# Altium PCB 数粒机接收板12通道.PcbDoc (part 2 of 5)
Units mm, origin at the board's own origin, x right, y up, seen from the top; angles counter-clockwise.
Board outline 316 x 52 mm, 2 copper layers (Top Layer, Bottom Layer); 209 components, 115 nets, 614 pads, 284 vias.
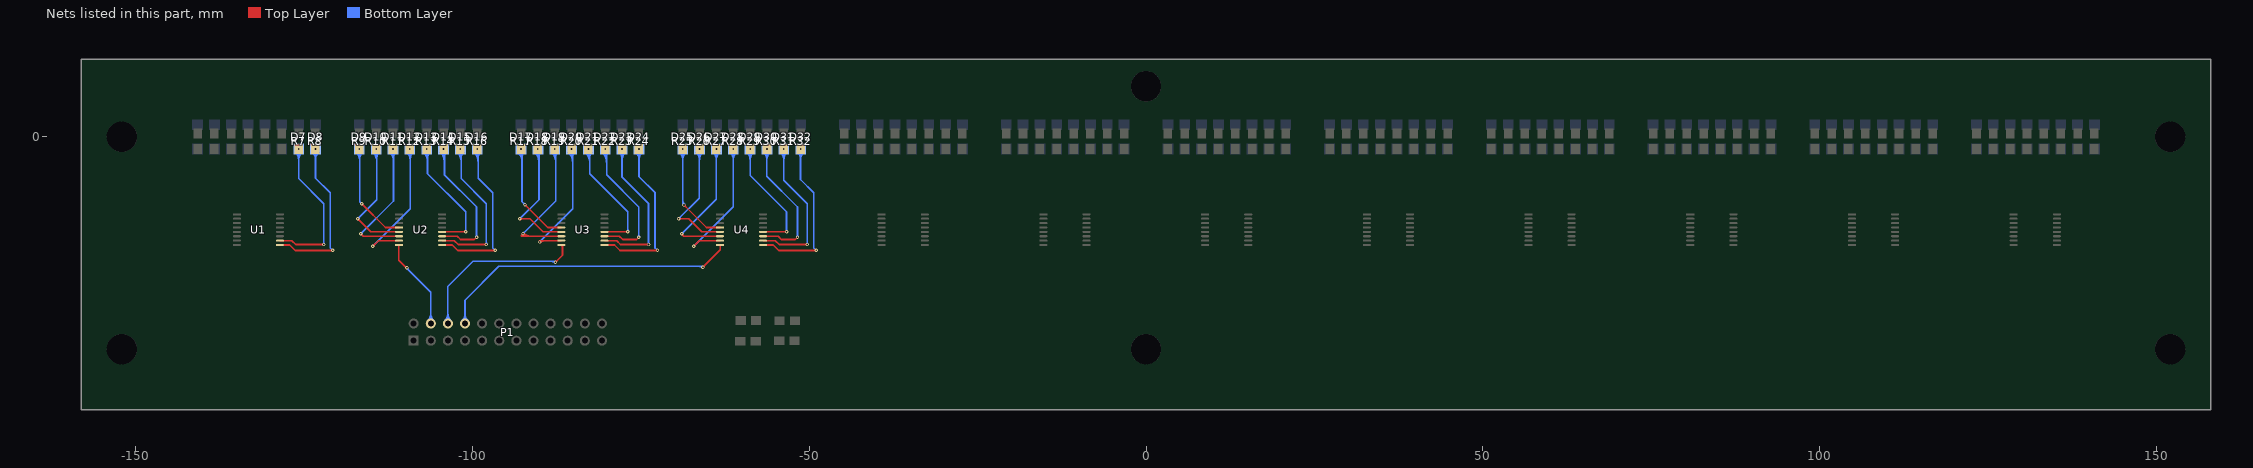
[diagram p2: the nets of this part, all layers, seen from the top]

## Via types
v1: diameter 0.508, hole 0.254, Top Layer to Bottom Layer, 284 vias

## Nets (pads, with @x,y where several pads share a name; then routed paths per layer and width w, separated by ;. In a path a pad name is that pad's centre, name@x,y a point inside that pad or via, vN(x,y) a via of type N, cw(c..) or ccw(c..) an arc to the next point about the centre after c; other vN are vias at no path point) (continued)
CH1-7: D7.1 R7.2 U1.10 | length 39.2
  Top Layer w0.254: U1.10@-128.531,-15.4 -126.774,-15.4 -126.194,-15.981 v1(-122.028,-15.981) ; -122.335,-15.981 cw(c-122.335,-16.287) v1@-122.118,-16.07 ; -122.335,-15.981 ccw(c-122.335,-15.674) v1@-122.118,-15.891 ; -122.335,-15.981 cw(c-122.335,-16.287) v1@-122.118,-16.07 ; -122.335,-15.981 ccw(c-122.335,-15.674) v1@-122.118,-15.891 ; -122.335,-15.981 ccw(c-122.335,-15.674) v1@-122.118,-15.891 ; -122.335,-15.981 cw(c-122.335,-16.287) v1@-122.118,-16.07
  Bottom Layer w0.254: v1(-125.75,-1.8) -125.75,-6.188 -122.028,-9.91 v1(-122.028,-15.981) ; D7.1@-126.226,-2.276 cw(c-127.375,-3.425) -125.75,-3.425 ; D7.1@-126.226,-2.276 cw(c-127.375,-3.425) -125.75,-3.425 ; D7.1@-126.226,-2.276 cw(c-127.375,-3.425) -125.75,-3.425 ; D7.1@-126.046,-2.096 cw(c-126.762,-2.812) -125.75,-2.812 ; D7.1@-126.046,-2.096 cw(c-126.762,-2.812) -125.75,-2.812 ; D7.1@-126.046,-2.096 cw(c-126.762,-2.812) -125.75,-2.812 ; D7.1@-125.84,-1.89 cw(c-126.057,-2.107) D7.1@-125.75,-2.107 ; D7.1@-125.84,-1.89 cw(c-126.057,-2.107) D7.1@-125.75,-2.107 ; D7.1@-125.84,-1.89 cw(c-126.057,-2.107) D7.1@-125.75,-2.107 ; -125.75,-3.425 cw(c-124.125,-3.425) D7.1@-125.274,-2.276 ; -125.75,-3.425 cw(c-124.125,-3.425) D7.1@-125.274,-2.276 ; -125.75,-3.425 cw(c-124.125,-3.425) D7.1@-125.274,-2.276 ; -125.75,-2.812 cw(c-124.738,-2.812) D7.1@-125.454,-2.096 ; -125.75,-2.812 cw(c-124.738,-2.812) D7.1@-125.454,-2.096 ; -125.75,-2.812 cw(c-124.738,-2.812) D7.1@-125.454,-2.096 ; D7.1@-125.75,-2.107 cw(c-125.443,-2.107) D7.1@-125.66,-1.89 ; D7.1@-125.75,-2.107 cw(c-125.443,-2.107) D7.1@-125.66,-1.89 ; D7.1@-125.75,-2.107 cw(c-125.443,-2.107) D7.1@-125.66,-1.89 ; v1@-122.118,-15.891 ccw(c-122.335,-15.674) -122.028,-15.674 ; v1@-122.118,-15.891 ccw(c-122.335,-15.674) -122.028,-15.674 ; v1@-122.118,-15.891 ccw(c-122.335,-15.674) -122.028,-15.674 ; -122.028,-15.674 ccw(c-121.721,-15.674) v1@-121.938,-15.891 ; -122.028,-15.674 ccw(c-121.721,-15.674) v1@-121.938,-15.891 ; -122.028,-15.674 ccw(c-121.721,-15.674) v1@-121.938,-15.891
CH1-8: D8.1 R8.2 U1.9 | length 39.1
  Top Layer w0.254: U1.9@-128.531,-16.05 -127.089,-16.05 -126.27,-16.87 -120.733,-16.87 v1(-120.707,-16.844) ; -121.075,-16.87 ccw(c-121.075,-16.476) v1@-120.797,-16.754 ; -121.075,-16.87 ccw(c-121.075,-16.476) v1@-120.797,-16.754 ; -121.075,-16.87 ccw(c-121.075,-16.476) v1@-120.797,-16.754
  Bottom Layer w0.254: v1(-123.25,-1.8) -123.25,-6.123 -121.063,-8.31 -121.063,-16.489 v1(-120.707,-16.844) ; D8.1@-123.726,-2.276 cw(c-124.875,-3.425) -123.25,-3.425 ; D8.1@-123.726,-2.276 cw(c-124.875,-3.425) -123.25,-3.425 ; D8.1@-123.726,-2.276 cw(c-124.875,-3.425) -123.25,-3.425 ; D8.1@-123.546,-2.096 cw(c-124.262,-2.812) -123.25,-2.812 ; D8.1@-123.546,-2.096 cw(c-124.262,-2.812) -123.25,-2.812 ; D8.1@-123.546,-2.096 cw(c-124.262,-2.812) -123.25,-2.812 ; D8.1@-123.34,-1.89 cw(c-123.557,-2.107) D8.1@-123.25,-2.107 ; D8.1@-123.34,-1.89 cw(c-123.557,-2.107) D8.1@-123.25,-2.107 ; D8.1@-123.34,-1.89 cw(c-123.557,-2.107) D8.1@-123.25,-2.107 ; -123.25,-3.425 cw(c-121.625,-3.425) D8.1@-122.774,-2.276 ; -123.25,-3.425 cw(c-121.625,-3.425) D8.1@-122.774,-2.276 ; -123.25,-3.425 cw(c-121.625,-3.425) D8.1@-122.774,-2.276 ; -123.25,-2.812 cw(c-122.238,-2.812) D8.1@-122.954,-2.096 ; -123.25,-2.812 cw(c-122.238,-2.812) D8.1@-122.954,-2.096 ; -123.25,-2.812 cw(c-122.238,-2.812) D8.1@-122.954,-2.096 ; D8.1@-123.25,-2.107 cw(c-122.943,-2.107) D8.1@-123.16,-1.89 ; D8.1@-123.25,-2.107 cw(c-122.943,-2.107) D8.1@-123.16,-1.89 ; D8.1@-123.25,-2.107 cw(c-122.943,-2.107) D8.1@-123.16,-1.89
CH2: P1.4 U2.8 | length 27.8
  Top Layer w0.254: U2.8@-110.852,-16.05 -110.903,-16.101 -110.903,-18.317 -109.785,-19.435 v1(-109.684,-19.435) ; -110.074,-19.146 ccw(c-109.684,-18.756) v1@-109.684,-19.308 ; -110.074,-19.146 ccw(c-109.684,-18.756) v1@-109.684,-19.308 ; -110.074,-19.146 ccw(c-109.684,-18.756) v1@-109.684,-19.308 ; -110.903,-16.228 cw(c-110.674,-16.228) -110.836,-16.066 ccw(c-110.674,-16.228) -110.903,-16.228
  Bottom Layer w0.254: v1(-109.684,-19.435) -109.709,-19.46 -109.709,-19.486 -106.153,-23.042 -106.153,-24.236 -106.142,-24.247 P1.4@-106.142,-27.708 ; v1@-109.557,-19.435 ccw(c-109.066,-19.435) -109.413,-19.782 ; v1@-109.557,-19.435 ccw(c-109.066,-19.435) -109.413,-19.782 ; v1@-109.557,-19.435 ccw(c-109.066,-19.435) -109.413,-19.782 ; P1.4@-106.582,-27.267 ccw(c-107.646,-26.204) -106.142,-26.204 ; P1.4@-106.582,-27.267 ccw(c-107.646,-26.204) -106.142,-26.204 ; P1.4@-106.582,-27.267 ccw(c-107.646,-26.204) -106.142,-26.204 ; P1.4@-106.403,-27.447 ccw(c-107.033,-26.817) -106.142,-26.817 ; P1.4@-106.403,-27.447 ccw(c-107.033,-26.817) -106.142,-26.817 ; P1.4@-106.403,-27.447 ccw(c-107.033,-26.817) -106.142,-26.817 ; -106.142,-26.817 ccw(c-105.251,-26.817) P1.4@-105.881,-27.447 ; -106.142,-26.817 ccw(c-105.251,-26.817) P1.4@-105.881,-27.447 ; -106.142,-26.817 ccw(c-105.251,-26.817) P1.4@-105.881,-27.447 ; -106.142,-26.204 ccw(c-104.638,-26.204) P1.4@-105.701,-27.267 ; -106.142,-26.204 ccw(c-104.638,-26.204) P1.4@-105.701,-27.267 ; -106.142,-26.204 ccw(c-104.638,-26.204) P1.4@-105.701,-27.267
CH2-1: D9.1 R9.2 U2.4 | length 30.4
  Top Layer w0.254: v1(-116.371,-9.935) -112.856,-13.45 U2.4@-110.852,-13.45 ; v1@-116.371,-10.062 cw(c-116.371,-10.369) -116.154,-10.152 ; v1@-116.371,-10.062 cw(c-116.371,-10.369) -116.154,-10.152 ; v1@-116.371,-10.062 cw(c-116.371,-10.369) -116.154,-10.152 ; v1@-116.244,-9.935 ccw(c-115.937,-9.935) -116.154,-10.152 ; v1@-116.244,-9.935 ccw(c-115.937,-9.935) -116.154,-10.152 ; v1@-116.244,-9.935 ccw(c-115.937,-9.935) -116.154,-10.152
  Bottom Layer w0.254: v1(-116.75,-1.8) -116.679,-1.871 -116.679,-9.628 v1(-116.371,-9.935) ; D9.1@-117.226,-2.276 cw(c-118.547,-3.597) -116.679,-3.597 ; D9.1@-117.226,-2.276 cw(c-118.547,-3.597) -116.679,-3.597 ; D9.1@-117.226,-2.276 cw(c-118.547,-3.597) -116.679,-3.597 ; D9.1@-117.046,-2.096 cw(c-117.934,-2.984) -116.679,-2.984 ; D9.1@-117.046,-2.096 cw(c-117.934,-2.984) -116.679,-2.984 ; D9.1@-117.046,-2.096 cw(c-117.934,-2.984) -116.679,-2.984 ; D9.1@-116.84,-1.89 cw(c-117.229,-2.279) D9.1@-116.679,-2.279 ; D9.1@-116.84,-1.89 cw(c-117.229,-2.279) D9.1@-116.679,-2.279 ; D9.1@-116.84,-1.89 cw(c-117.229,-2.279) D9.1@-116.679,-2.279 ; -116.679,-3.253 cw(c-115.297,-3.253) D9.1@-116.274,-2.276 ; -116.679,-3.253 cw(c-115.297,-3.253) D9.1@-116.274,-2.276 ; -116.679,-3.253 cw(c-115.297,-3.253) D9.1@-116.274,-2.276 ; -116.679,-2.639 cw(c-115.911,-2.639) D9.1@-116.454,-2.096 ; -116.679,-2.639 cw(c-115.911,-2.639) D9.1@-116.454,-2.096 ; -116.679,-2.639 cw(c-115.911,-2.639) D9.1@-116.454,-2.096
CH2-2: D10.1 R10.2 U2.5 | length 35.2
  Top Layer w0.254: v1(-116.999,-12.171) -115.069,-14.1 U2.5@-110.852,-14.1 ; v1@-116.999,-12.298 cw(c-116.999,-12.604) -116.782,-12.387 ; v1@-116.999,-12.298 cw(c-116.999,-12.604) -116.782,-12.387 ; v1@-116.999,-12.298 cw(c-116.999,-12.604) -116.782,-12.387 ; v1@-116.872,-12.171 ccw(c-116.565,-12.171) -116.782,-12.387 ; v1@-116.872,-12.171 ccw(c-116.565,-12.171) -116.782,-12.387 ; v1@-116.872,-12.171 ccw(c-116.565,-12.171) -116.782,-12.387
  Bottom Layer w0.254: v1(-116.999,-12.171) -114.171,-9.343 D10.1@-114.171,-1.8 ; v1@-116.999,-12.044 ccw(c-116.999,-11.737) -116.782,-11.954 ; v1@-116.999,-12.044 ccw(c-116.999,-11.737) -116.782,-11.954 ; v1@-116.999,-12.044 ccw(c-116.999,-11.737) -116.782,-11.954 ; v1@-116.872,-12.171 cw(c-116.565,-12.171) -116.782,-11.954 ; v1@-116.872,-12.171 cw(c-116.565,-12.171) -116.782,-11.954 ; v1@-116.872,-12.171 cw(c-116.565,-12.171) -116.782,-11.954 ; D10.1@-114.726,-2.276 cw(c-116.066,-3.616) -114.171,-3.616 ; D10.1@-114.726,-2.276 cw(c-116.066,-3.616) -114.171,-3.616 ; D10.1@-114.726,-2.276 cw(c-116.066,-3.616) -114.171,-3.616 ; D10.1@-114.546,-2.096 cw(c-115.453,-3.003) -114.171,-3.003 ; D10.1@-114.546,-2.096 cw(c-115.453,-3.003) -114.171,-3.003 ; D10.1@-114.546,-2.096 cw(c-115.453,-3.003) -114.171,-3.003 ; D10.1@-114.34,-1.89 cw(c-114.748,-2.298) D10.1@-114.171,-2.298 ; D10.1@-114.34,-1.89 cw(c-114.748,-2.298) D10.1@-114.171,-2.298 ; D10.1@-114.34,-1.89 cw(c-114.748,-2.298) D10.1@-114.171,-2.298 ; -114.171,-3.234 cw(c-112.816,-3.234) D10.1@-113.774,-2.276 ; -114.171,-3.234 cw(c-112.816,-3.234) D10.1@-113.774,-2.276 ; -114.171,-3.234 cw(c-112.816,-3.234) D10.1@-113.774,-2.276 ; -114.171,-2.62 cw(c-113.43,-2.62) D10.1@-113.954,-2.096 ; -114.171,-2.62 cw(c-113.43,-2.62) D10.1@-113.954,-2.096 ; -114.171,-2.62 cw(c-113.43,-2.62) D10.1@-113.954,-2.096
  other v1: -114.25,-1.8
CH2-3: D11.1 R11.2 U2.6 | length 37.1
  Top Layer w0.254: v1(-116.542,-14.38) -116.172,-14.75 U2.6@-110.852,-14.75 ; v1@-116.542,-14.507 cw(c-116.542,-14.814) -116.325,-14.597 ; v1@-116.542,-14.507 cw(c-116.542,-14.814) -116.325,-14.597 ; v1@-116.542,-14.507 cw(c-116.542,-14.814) -116.325,-14.597 ; v1@-116.415,-14.38 ccw(c-116.108,-14.38) -116.325,-14.597 ; v1@-116.415,-14.38 ccw(c-116.108,-14.38) -116.325,-14.597 ; v1@-116.415,-14.38 ccw(c-116.108,-14.38) -116.325,-14.597
  Bottom Layer w0.254: v1(-116.542,-14.38) -111.671,-9.51 D11.1@-111.671,-1.8 ; v1@-116.542,-14.253 ccw(c-116.542,-13.947) -116.325,-14.164 ; v1@-116.542,-14.253 ccw(c-116.542,-13.947) -116.325,-14.164 ; v1@-116.542,-14.253 ccw(c-116.542,-13.947) -116.325,-14.164 ; v1@-116.415,-14.38 cw(c-116.108,-14.38) -116.325,-14.164 ; v1@-116.415,-14.38 cw(c-116.108,-14.38) -116.325,-14.164 ; v1@-116.415,-14.38 cw(c-116.108,-14.38) -116.325,-14.164 ; D11.1@-112.226,-2.276 cw(c-113.566,-3.616) -111.671,-3.616 ; D11.1@-112.226,-2.276 cw(c-113.566,-3.616) -111.671,-3.616 ; D11.1@-112.226,-2.276 cw(c-113.566,-3.616) -111.671,-3.616 ; D11.1@-112.046,-2.096 cw(c-112.953,-3.003) -111.671,-3.003 ; D11.1@-112.046,-2.096 cw(c-112.953,-3.003) -111.671,-3.003 ; D11.1@-112.046,-2.096 cw(c-112.953,-3.003) -111.671,-3.003 ; D11.1@-111.84,-1.89 cw(c-112.248,-2.298) D11.1@-111.671,-2.298 ; D11.1@-111.84,-1.89 cw(c-112.248,-2.298) D11.1@-111.671,-2.298 ; D11.1@-111.84,-1.89 cw(c-112.248,-2.298) D11.1@-111.671,-2.298 ; -111.671,-3.234 cw(c-110.316,-3.234) D11.1@-111.274,-2.276 ; -111.671,-3.234 cw(c-110.316,-3.234) D11.1@-111.274,-2.276 ; -111.671,-3.234 cw(c-110.316,-3.234) D11.1@-111.274,-2.276 ; -111.671,-2.62 cw(c-110.93,-2.62) D11.1@-111.454,-2.096 ; -111.671,-2.62 cw(c-110.93,-2.62) D11.1@-111.454,-2.096 ; -111.671,-2.62 cw(c-110.93,-2.62) D11.1@-111.454,-2.096
  other v1: -111.75,-1.8
CH2-4: D12.1 R12.2 U2.7 | length 37.6
  Top Layer w0.254: v1(-114.738,-16.237) -113.901,-15.4 U2.7@-110.852,-15.4 ; v1@-114.738,-16.11 ccw(c-114.738,-15.803) -114.521,-16.02 ; v1@-114.738,-16.11 ccw(c-114.738,-15.803) -114.521,-16.02 ; v1@-114.738,-16.11 ccw(c-114.738,-15.803) -114.521,-16.02 ; v1@-114.611,-16.237 cw(c-114.305,-16.237) -114.521,-16.02 ; v1@-114.611,-16.237 cw(c-114.305,-16.237) -114.521,-16.02 ; v1@-114.611,-16.237 cw(c-114.305,-16.237) -114.521,-16.02
  Bottom Layer w0.254: v1(-114.738,-16.237) -109.171,-10.669 D12.1@-109.171,-1.8 ; v1@-114.738,-16.11 ccw(c-114.738,-15.803) -114.521,-16.02 ; v1@-114.738,-16.11 ccw(c-114.738,-15.803) -114.521,-16.02 ; v1@-114.738,-16.11 ccw(c-114.738,-15.803) -114.521,-16.02 ; v1@-114.611,-16.237 cw(c-114.305,-16.237) -114.521,-16.02 ; v1@-114.611,-16.237 cw(c-114.305,-16.237) -114.521,-16.02 ; v1@-114.611,-16.237 cw(c-114.305,-16.237) -114.521,-16.02 ; D12.1@-109.726,-2.276 cw(c-111.066,-3.616) -109.171,-3.616 ; D12.1@-109.726,-2.276 cw(c-111.066,-3.616) -109.171,-3.616 ; D12.1@-109.726,-2.276 cw(c-111.066,-3.616) -109.171,-3.616 ; D12.1@-109.546,-2.096 cw(c-110.453,-3.003) -109.171,-3.003 ; D12.1@-109.546,-2.096 cw(c-110.453,-3.003) -109.171,-3.003 ; D12.1@-109.546,-2.096 cw(c-110.453,-3.003) -109.171,-3.003 ; D12.1@-109.34,-1.89 cw(c-109.748,-2.298) D12.1@-109.171,-2.298 ; D12.1@-109.34,-1.89 cw(c-109.748,-2.298) D12.1@-109.171,-2.298 ; D12.1@-109.34,-1.89 cw(c-109.748,-2.298) D12.1@-109.171,-2.298 ; -109.171,-3.234 cw(c-107.816,-3.234) D12.1@-108.774,-2.276 ; -109.171,-3.234 cw(c-107.816,-3.234) D12.1@-108.774,-2.276 ; -109.171,-3.234 cw(c-107.816,-3.234) D12.1@-108.774,-2.276 ; -109.171,-2.62 cw(c-108.43,-2.62) D12.1@-108.954,-2.096 ; -109.171,-2.62 cw(c-108.43,-2.62) D12.1@-108.954,-2.096 ; -109.171,-2.62 cw(c-108.43,-2.62) D12.1@-108.954,-2.096
  other v1: -109.25,-1.8
CH2-5: D13.1 R13.2 U2.12 | length 33.3
  Top Layer w0.254: U2.12@-104.401,-14.1 -100.996,-14.1 v1(-100.971,-14.076) ; -101.337,-14.1 ccw(c-101.337,-13.71) v1@-101.061,-13.986 ; -101.337,-14.1 ccw(c-101.337,-13.71) v1@-101.061,-13.986 ; -101.337,-14.1 ccw(c-101.337,-13.71) v1@-101.061,-13.986
  Bottom Layer w0.254: D13.1@-106.62,-1.8 -106.62,-5.481 -100.971,-11.129 v1(-100.971,-14.076) ; D13.1@-107.226,-2.276 cw(c-108.689,-3.739) -106.62,-3.739 ; D13.1@-107.226,-2.276 cw(c-108.689,-3.739) -106.62,-3.739 ; D13.1@-107.226,-2.276 cw(c-108.689,-3.739) -106.62,-3.739 ; D13.1@-107.046,-2.096 cw(c-108.075,-3.125) -106.62,-3.125 ; D13.1@-107.046,-2.096 cw(c-108.075,-3.125) -106.62,-3.125 ; D13.1@-107.046,-2.096 cw(c-108.075,-3.125) -106.62,-3.125 ; D13.1@-106.84,-1.89 cw(c-107.37,-2.42) D13.1@-106.62,-2.42 ; D13.1@-106.84,-1.89 cw(c-107.37,-2.42) D13.1@-106.62,-2.42 ; D13.1@-106.84,-1.89 cw(c-107.37,-2.42) D13.1@-106.62,-2.42 ; -106.62,-3.111 cw(c-105.439,-3.111) D13.1@-106.274,-2.276 ; -106.62,-3.111 cw(c-105.439,-3.111) D13.1@-106.274,-2.276 ; -106.62,-3.111 cw(c-105.439,-3.111) D13.1@-106.274,-2.276 ; v1@-101.061,-13.986 ccw(c-101.278,-13.769) -100.971,-13.769 ; v1@-101.061,-13.986 ccw(c-101.278,-13.769) -100.971,-13.769 ; v1@-101.061,-13.986 ccw(c-101.278,-13.769) -100.971,-13.769 ; -100.971,-13.769 ccw(c-100.665,-13.769) v1@-100.882,-13.986 ; -100.971,-13.769 ccw(c-100.665,-13.769) v1@-100.882,-13.986 ; -100.971,-13.769 ccw(c-100.665,-13.769) v1@-100.882,-13.986
  other v1: -106.75,-1.8
CH2-6: D14.1 R14.2 U2.11 | length 34.8
  Top Layer w0.254: U2.11@-104.401,-14.75 -102.227,-14.75 -101.733,-15.244 -99.701,-15.244 v1(-99.346,-14.888)
  Bottom Layer w0.254: D14.1@-104.12,-1.8 -104.12,-5.644 -99.346,-10.418 v1(-99.346,-14.888) ; D14.1@-104.726,-2.276 cw(c-106.189,-3.739) -104.12,-3.739 ; D14.1@-104.726,-2.276 cw(c-106.189,-3.739) -104.12,-3.739 ; D14.1@-104.726,-2.276 cw(c-106.189,-3.739) -104.12,-3.739 ; D14.1@-104.546,-2.096 cw(c-105.575,-3.125) -104.12,-3.125 ; D14.1@-104.546,-2.096 cw(c-105.575,-3.125) -104.12,-3.125 ; D14.1@-104.546,-2.096 cw(c-105.575,-3.125) -104.12,-3.125 ; D14.1@-104.34,-1.89 cw(c-104.87,-2.42) D14.1@-104.12,-2.42 ; D14.1@-104.34,-1.89 cw(c-104.87,-2.42) D14.1@-104.12,-2.42 ; D14.1@-104.34,-1.89 cw(c-104.87,-2.42) D14.1@-104.12,-2.42 ; -104.12,-3.111 cw(c-102.939,-3.111) D14.1@-103.774,-2.276 ; -104.12,-3.111 cw(c-102.939,-3.111) D14.1@-103.774,-2.276 ; -104.12,-3.111 cw(c-102.939,-3.111) D14.1@-103.774,-2.276 ; v1@-99.436,-14.799 ccw(c-99.652,-14.582) -99.346,-14.582 ; v1@-99.436,-14.799 ccw(c-99.652,-14.582) -99.346,-14.582 ; v1@-99.436,-14.799 ccw(c-99.652,-14.582) -99.346,-14.582 ; -99.346,-14.582 ccw(c-99.039,-14.582) v1@-99.256,-14.799 ; -99.346,-14.582 ccw(c-99.039,-14.582) v1@-99.256,-14.799 ; -99.346,-14.582 ccw(c-99.039,-14.582) v1@-99.256,-14.799
  other v1: -104.25,-1.8
CH2-7: D15.1 R15.2 U2.10 | length 38.2
  Top Layer w0.254: U2.10@-104.401,-15.4 -102.644,-15.4 -102.064,-15.981 v1(-97.898,-15.981) ; -98.205,-15.981 cw(c-98.205,-16.287) v1@-97.988,-16.07 ; -98.205,-15.981 ccw(c-98.205,-15.674) v1@-97.988,-15.891 ; -98.205,-15.981 cw(c-98.205,-16.287) v1@-97.988,-16.07 ; -98.205,-15.981 ccw(c-98.205,-15.674) v1@-97.988,-15.891 ; -98.205,-15.981 ccw(c-98.205,-15.674) v1@-97.988,-15.891 ; -98.205,-15.981 cw(c-98.205,-16.287) v1@-97.988,-16.07
  Bottom Layer w0.254: D15.1@-101.62,-1.8 -101.62,-6.188 -97.898,-9.91 v1(-97.898,-15.981) ; D15.1@-102.226,-2.276 cw(c-103.689,-3.739) -101.62,-3.739 ; D15.1@-102.226,-2.276 cw(c-103.689,-3.739) -101.62,-3.739 ; D15.1@-102.226,-2.276 cw(c-103.689,-3.739) -101.62,-3.739 ; D15.1@-102.046,-2.096 cw(c-103.075,-3.125) -101.62,-3.125 ; D15.1@-102.046,-2.096 cw(c-103.075,-3.125) -101.62,-3.125 ; D15.1@-102.046,-2.096 cw(c-103.075,-3.125) -101.62,-3.125 ; D15.1@-101.84,-1.89 cw(c-102.37,-2.42) D15.1@-101.62,-2.42 ; D15.1@-101.84,-1.89 cw(c-102.37,-2.42) D15.1@-101.62,-2.42 ; D15.1@-101.84,-1.89 cw(c-102.37,-2.42) D15.1@-101.62,-2.42 ; -101.62,-3.111 cw(c-100.439,-3.111) D15.1@-101.274,-2.276 ; -101.62,-3.111 cw(c-100.439,-3.111) D15.1@-101.274,-2.276 ; -101.62,-3.111 cw(c-100.439,-3.111) D15.1@-101.274,-2.276 ; v1@-97.988,-15.891 ccw(c-98.205,-15.674) -97.898,-15.674 ; v1@-97.988,-15.891 ccw(c-98.205,-15.674) -97.898,-15.674 ; v1@-97.988,-15.891 ccw(c-98.205,-15.674) -97.898,-15.674 ; -97.898,-15.674 ccw(c-97.591,-15.674) v1@-97.808,-15.891 ; -97.898,-15.674 ccw(c-97.591,-15.674) v1@-97.808,-15.891 ; -97.898,-15.674 ccw(c-97.591,-15.674) v1@-97.808,-15.891
  other v1: -101.75,-1.8
CH2-8: D16.1 R16.2 U2.9 | length 38.1
  Top Layer w0.254: U2.9@-104.401,-16.05 -102.959,-16.05 -102.14,-16.87 -96.603,-16.87 v1(-96.577,-16.844) ; -96.945,-16.87 ccw(c-96.945,-16.476) v1@-96.667,-16.754 ; -96.945,-16.87 ccw(c-96.945,-16.476) v1@-96.667,-16.754 ; -96.945,-16.87 ccw(c-96.945,-16.476) v1@-96.667,-16.754
  Bottom Layer w0.254: D16.1@-99.12,-1.8 -99.12,-6.123 -96.933,-8.31 -96.933,-16.489 v1(-96.577,-16.844) ; D16.1@-99.726,-2.276 cw(c-101.189,-3.739) -99.12,-3.739 ; D16.1@-99.726,-2.276 cw(c-101.189,-3.739) -99.12,-3.739 ; D16.1@-99.726,-2.276 cw(c-101.189,-3.739) -99.12,-3.739 ; D16.1@-99.546,-2.096 cw(c-100.575,-3.125) -99.12,-3.125 ; D16.1@-99.546,-2.096 cw(c-100.575,-3.125) -99.12,-3.125 ; D16.1@-99.546,-2.096 cw(c-100.575,-3.125) -99.12,-3.125 ; D16.1@-99.34,-1.89 cw(c-99.87,-2.42) D16.1@-99.12,-2.42 ; D16.1@-99.34,-1.89 cw(c-99.87,-2.42) D16.1@-99.12,-2.42 ; D16.1@-99.34,-1.89 cw(c-99.87,-2.42) D16.1@-99.12,-2.42 ; -99.12,-3.111 cw(c-97.939,-3.111) D16.1@-98.774,-2.276 ; -99.12,-3.111 cw(c-97.939,-3.111) D16.1@-98.774,-2.276 ; -99.12,-3.111 cw(c-97.939,-3.111) D16.1@-98.774,-2.276
  other v1: -99.25,-1.8
CH3: P1.6 U3.8 | length 41.9
  Top Layer w0.254: v1(-87.634,-18.623) -86.595,-17.585 -86.595,-16.228 U3.8@-86.773,-16.05 ; v1@-87.634,-18.496 ccw(c-87.634,-18.189) -87.417,-18.406 ; v1@-87.634,-18.496 ccw(c-87.634,-18.189) -87.417,-18.406 ; v1@-87.634,-18.496 ccw(c-87.634,-18.189) -87.417,-18.406 ; v1@-87.507,-18.623 cw(c-87.2,-18.623) -87.417,-18.406 ; v1@-87.507,-18.623 cw(c-87.2,-18.623) -87.417,-18.406 ; v1@-87.507,-18.623 cw(c-87.2,-18.623) -87.417,-18.406 ; U3.8@-86.789,-16.066 cw(c-87.258,-16.535) -86.595,-16.535 ccw(c-87.258,-16.535) U3.8@-86.789,-16.066 ; U3.8@-86.778,-16.072 cw(c-86.83,-16.301) -86.595,-16.301 ccw(c-86.83,-16.301) U3.8@-86.778,-16.072
  Bottom Layer w0.254: P1.6@-103.613,-27.708 -103.613,-22.204 -99.872,-18.462 -87.794,-18.462 v1(-87.634,-18.623) ; P1.6@-104.042,-27.267 ccw(c-105.079,-26.231) -103.613,-26.231 ; P1.6@-104.042,-27.267 ccw(c-105.079,-26.231) -103.613,-26.231 ; P1.6@-104.042,-27.267 ccw(c-105.079,-26.231) -103.613,-26.231 ; P1.6@-103.863,-27.447 ccw(c-104.466,-26.844) -103.613,-26.844 ; P1.6@-103.863,-27.447 ccw(c-104.466,-26.844) -103.613,-26.844 ; P1.6@-103.863,-27.447 ccw(c-104.466,-26.844) -103.613,-26.844 ; -103.613,-26.79 ccw(c-102.684,-26.79) P1.6@-103.341,-27.447 ; -103.613,-26.79 ccw(c-102.684,-26.79) P1.6@-103.341,-27.447 ; -103.613,-26.79 ccw(c-102.684,-26.79) P1.6@-103.341,-27.447 ; -103.613,-26.177 ccw(c-102.071,-26.177) P1.6@-103.161,-27.267 ; -103.613,-26.177 ccw(c-102.071,-26.177) P1.6@-103.161,-27.267 ; -103.613,-26.177 ccw(c-102.071,-26.177) P1.6@-103.161,-27.267 ; -88.328,-18.462 cw(c-88.328,-19.318) -87.723,-18.713 ccw(c-88.328,-19.318) -88.328,-18.462
CH3-1: D17.1 R17.2 U3.4 | length 31.4
  Top Layer w0.254: v1(-92.159,-10.068) -88.777,-13.45 U3.4@-86.773,-13.45 ; v1@-92.159,-10.195 cw(c-92.159,-10.501) -91.942,-10.285 ; v1@-92.159,-10.195 cw(c-92.159,-10.501) -91.942,-10.285 ; v1@-92.159,-10.195 cw(c-92.159,-10.501) -91.942,-10.285 ; v1@-92.032,-10.068 ccw(c-91.726,-10.068) -91.942,-10.285 ; v1@-92.032,-10.068 ccw(c-91.726,-10.068) -91.942,-10.285 ; v1@-92.032,-10.068 ccw(c-91.726,-10.068) -91.942,-10.285
  Bottom Layer w0.254: v1(-92.75,-1.8) -92.6,-1.95 -92.6,-9.628 v1(-92.159,-10.068) ; D17.1@-93.226,-2.276 cw(c-94.738,-3.788) -92.6,-3.788 ; D17.1@-93.226,-2.276 cw(c-94.738,-3.788) -92.6,-3.788 ; D17.1@-93.226,-2.276 cw(c-94.738,-3.788) -92.6,-3.788 ; D17.1@-93.046,-2.096 cw(c-94.125,-3.175) -92.6,-3.175 ; D17.1@-93.046,-2.096 cw(c-94.125,-3.175) -92.6,-3.175 ; D17.1@-93.046,-2.096 cw(c-94.125,-3.175) -92.6,-3.175 ; D17.1@-92.84,-1.89 cw(c-93.42,-2.47) D17.1@-92.6,-2.47 ; D17.1@-92.84,-1.89 cw(c-93.42,-2.47) D17.1@-92.6,-2.47 ; D17.1@-92.84,-1.89 cw(c-93.42,-2.47) D17.1@-92.6,-2.47 ; -92.6,-3.061 cw(c-91.489,-3.061) D17.1@-92.274,-2.276 ; -92.6,-3.061 cw(c-91.489,-3.061) D17.1@-92.274,-2.276 ; -92.6,-3.061 cw(c-91.489,-3.061) D17.1@-92.274,-2.276 ; -92.376,-9.851 cw(c-92.593,-10.068) v1@-92.286,-10.068 ; -92.376,-9.851 ccw(c-92.159,-9.634) v1@-92.159,-9.941 ; -92.376,-9.851 cw(c-92.593,-10.068) v1@-92.286,-10.068 ; -92.376,-9.851 ccw(c-92.159,-9.634) v1@-92.159,-9.941 ; -92.376,-9.851 ccw(c-92.159,-9.634) v1@-92.159,-9.941 ; -92.376,-9.851 cw(c-92.593,-10.068) v1@-92.286,-10.068
CH3-2: D18.1 R18.2 U3.5 | length 34.7
  Top Layer w0.254: v1(-92.92,-12.171) -91.421,-12.171 -89.492,-14.1 U3.5@-86.773,-14.1 ; v1@-92.83,-12.26 cw(c-92.613,-12.477) -92.613,-12.171 ; v1@-92.83,-12.26 cw(c-92.613,-12.477) -92.613,-12.171 ; v1@-92.83,-12.26 cw(c-92.613,-12.477) -92.613,-12.171 ; v1@-92.83,-12.081 ccw(c-92.613,-11.864) -92.613,-12.171 ; v1@-92.83,-12.081 ccw(c-92.613,-11.864) -92.613,-12.171 ; v1@-92.83,-12.081 ccw(c-92.613,-11.864) -92.613,-12.171
  Bottom Layer w0.254: v1(-92.92,-12.171) -90.092,-9.343 D18.1@-90.092,-1.8 ; v1@-92.92,-12.044 ccw(c-92.92,-11.737) -92.703,-11.954 ; v1@-92.92,-12.044 ccw(c-92.92,-11.737) -92.703,-11.954 ; v1@-92.92,-12.044 ccw(c-92.92,-11.737) -92.703,-11.954 ; v1@-92.793,-12.171 cw(c-92.486,-12.171) -92.703,-11.954 ; v1@-92.793,-12.171 cw(c-92.486,-12.171) -92.703,-11.954 ; v1@-92.793,-12.171 cw(c-92.486,-12.171) -92.703,-11.954 ; D18.1@-90.726,-2.276 cw(c-92.257,-3.807) -90.092,-3.807 ; D18.1@-90.726,-2.276 cw(c-92.257,-3.807) -90.092,-3.807 ; D18.1@-90.726,-2.276 cw(c-92.257,-3.807) -90.092,-3.807 ; D18.1@-90.546,-2.096 cw(c-91.644,-3.194) -90.092,-3.194 ; D18.1@-90.546,-2.096 cw(c-91.644,-3.194) -90.092,-3.194 ; D18.1@-90.546,-2.096 cw(c-91.644,-3.194) -90.092,-3.194 ; D18.1@-90.34,-1.89 cw(c-90.939,-2.489) D18.1@-90.092,-2.489 ; D18.1@-90.34,-1.89 cw(c-90.939,-2.489) D18.1@-90.092,-2.489 ; D18.1@-90.34,-1.89 cw(c-90.939,-2.489) D18.1@-90.092,-2.489 ; -90.092,-3.042 cw(c-89.008,-3.042) D18.1@-89.774,-2.276 ; -90.092,-3.042 cw(c-89.008,-3.042) D18.1@-89.774,-2.276 ; -90.092,-3.042 cw(c-89.008,-3.042) D18.1@-89.774,-2.276
  other v1: -90.25,-1.8
CH3-3: D19.1 R19.2 U3.6 | length 42.1
  Top Layer w0.254: v1(-92.462,-14.38) -92.462,-14.685 -92.398,-14.75 U3.6@-86.773,-14.75 ; -92.732,-14.65 ccw(c-92.49,-14.408) -92.49,-14.75 ; -92.732,-14.65 ccw(c-92.49,-14.408) -92.49,-14.75 ; -92.732,-14.65 ccw(c-92.49,-14.408) -92.49,-14.75 ; v1@-92.552,-14.47 ccw(c-91.877,-13.795) -91.877,-14.75 ; v1@-92.552,-14.47 ccw(c-91.877,-13.795) -91.877,-14.75 ; v1@-92.552,-14.47 ccw(c-91.877,-13.795) -91.877,-14.75 ; v1@-92.373,-14.291 ccw(c-91.263,-13.181) -91.263,-14.75 ; v1@-92.373,-14.291 ccw(c-91.263,-13.181) -91.263,-14.75 ; v1@-92.373,-14.291 ccw(c-91.263,-13.181) -91.263,-14.75
  Bottom Layer w0.254: v1(-92.462,-14.38) -87.592,-9.51 D19.1@-87.592,-1.8 ; v1@-92.462,-14.253 ccw(c-92.462,-13.947) -92.246,-14.164 ; v1@-92.462,-14.253 ccw(c-92.462,-13.947) -92.246,-14.164 ; v1@-92.462,-14.253 ccw(c-92.462,-13.947) -92.246,-14.164 ; v1@-92.335,-14.38 cw(c-92.029,-14.38) -92.246,-14.164 ; v1@-92.335,-14.38 cw(c-92.029,-14.38) -92.246,-14.164 ; v1@-92.335,-14.38 cw(c-92.029,-14.38) -92.246,-14.164 ; D19.1@-88.226,-2.276 cw(c-89.757,-3.807) -87.592,-3.807 ; D19.1@-88.226,-2.276 cw(c-89.757,-3.807) -87.592,-3.807 ; D19.1@-88.226,-2.276 cw(c-89.757,-3.807) -87.592,-3.807 ; D19.1@-88.046,-2.096 cw(c-89.144,-3.194) -87.592,-3.194 ; D19.1@-88.046,-2.096 cw(c-89.144,-3.194) -87.592,-3.194 ; D19.1@-88.046,-2.096 cw(c-89.144,-3.194) -87.592,-3.194 ; D19.1@-87.84,-1.89 cw(c-88.439,-2.489) D19.1@-87.592,-2.489 ; D19.1@-87.84,-1.89 cw(c-88.439,-2.489) D19.1@-87.592,-2.489 ; D19.1@-87.84,-1.89 cw(c-88.439,-2.489) D19.1@-87.592,-2.489 ; -87.592,-3.042 cw(c-86.508,-3.042) D19.1@-87.274,-2.276 ; -87.592,-3.042 cw(c-86.508,-3.042) D19.1@-87.274,-2.276 ; -87.592,-3.042 cw(c-86.508,-3.042) D19.1@-87.274,-2.276
  other v1: -87.75,-1.8
CH3-4: D20.1 R20.2 U3.7 | length 35.6
  Top Layer w0.254: v1(-89.973,-15.6) -89.973,-15.551 -89.822,-15.4 U3.7@-86.773,-15.4 ; v1@-90.063,-15.51 cw(c-89.798,-15.775) -89.798,-15.4 ccw(c-89.798,-15.775) v1@-90.063,-15.51 ; v1@-89.883,-15.689 cw(c-89.185,-16.388) -89.185,-15.4 ccw(c-89.185,-16.388) v1@-89.883,-15.689
  Bottom Layer w0.254: v1(-89.973,-15.6) -89.973,-15.551 -85.092,-10.669 D20.1@-85.092,-1.8 ; v1@-89.846,-15.6 cw(c-89.422,-15.6) -89.722,-15.3 ; v1@-89.846,-15.6 cw(c-89.422,-15.6) -89.722,-15.3 ; v1@-89.846,-15.6 cw(c-89.422,-15.6) -89.722,-15.3 ; D20.1@-85.726,-2.276 cw(c-87.257,-3.807) -85.092,-3.807 ; D20.1@-85.726,-2.276 cw(c-87.257,-3.807) -85.092,-3.807 ; D20.1@-85.726,-2.276 cw(c-87.257,-3.807) -85.092,-3.807 ; D20.1@-85.546,-2.096 cw(c-86.644,-3.194) -85.092,-3.194 ; D20.1@-85.546,-2.096 cw(c-86.644,-3.194) -85.092,-3.194 ; D20.1@-85.546,-2.096 cw(c-86.644,-3.194) -85.092,-3.194 ; D20.1@-85.34,-1.89 cw(c-85.939,-2.489) D20.1@-85.092,-2.489 ; D20.1@-85.34,-1.89 cw(c-85.939,-2.489) D20.1@-85.092,-2.489 ; D20.1@-85.34,-1.89 cw(c-85.939,-2.489) D20.1@-85.092,-2.489 ; -85.092,-3.042 cw(c-84.008,-3.042) D20.1@-84.774,-2.276 ; -85.092,-3.042 cw(c-84.008,-3.042) D20.1@-84.774,-2.276 ; -85.092,-3.042 cw(c-84.008,-3.042) D20.1@-84.774,-2.276
  other v1: -85.25,-1.8
CH3-5: D21.1 R21.2 U3.12 | length 38.1
  Top Layer w0.254: U3.12@-80.322,-14.1 -76.917,-14.1 v1(-76.892,-14.076) ; -77.258,-14.1 ccw(c-77.258,-13.71) v1@-76.982,-13.986 ; -77.258,-14.1 ccw(c-77.258,-13.71) v1@-76.982,-13.986 ; -77.258,-14.1 ccw(c-77.258,-13.71) v1@-76.982,-13.986
  Bottom Layer w0.254: D21.1@-82.541,-1.8 -82.541,-5.481 -76.892,-11.129 v1(-76.892,-14.076) ; D21.1@-83.226,-2.276 cw(c-84.88,-3.93) -82.541,-3.93 ; D21.1@-83.226,-2.276 cw(c-84.88,-3.93) -82.541,-3.93 ; D21.1@-83.226,-2.276 cw(c-84.88,-3.93) -82.541,-3.93 ; D21.1@-83.046,-2.096 cw(c-84.267,-3.317) -82.541,-3.317 ; D21.1@-83.046,-2.096 cw(c-84.267,-3.317) -82.541,-3.317 ; D21.1@-83.046,-2.096 cw(c-84.267,-3.317) -82.541,-3.317 ; D21.1@-82.867,-1.917 cw(c-83.653,-2.703) -82.541,-2.703 ; D21.1@-82.867,-1.917 cw(c-83.653,-2.703) -82.541,-2.703 ; D21.1@-82.867,-1.917 cw(c-83.653,-2.703) -82.541,-2.703 ; D21.1@-82.84,-1.89 cw(c-83.562,-2.612) -82.541,-2.612 ; D21.1@-82.84,-1.89 cw(c-83.562,-2.612) -82.541,-2.612 ; D21.1@-82.84,-1.89 cw(c-83.562,-2.612) -82.541,-2.612 ; D21.1@-82.66,-1.71 cw(c-82.948,-1.998) D21.1@-82.541,-1.998 ; D21.1@-82.66,-1.71 cw(c-82.948,-1.998) D21.1@-82.541,-1.998 ; D21.1@-82.66,-1.71 cw(c-82.948,-1.998) D21.1@-82.541,-1.998 ; -82.541,-2.92 cw(c-81.63,-2.92) D21.1@-82.274,-2.276 ; -82.541,-2.92 cw(c-81.63,-2.92) D21.1@-82.274,-2.276 ; -82.541,-2.92 cw(c-81.63,-2.92) D21.1@-82.274,-2.276 ; v1@-76.982,-13.986 ccw(c-77.199,-13.769) -76.892,-13.769 ; v1@-76.982,-13.986 ccw(c-77.199,-13.769) -76.892,-13.769 ; v1@-76.982,-13.986 ccw(c-77.199,-13.769) -76.892,-13.769 ; -76.892,-13.769 ccw(c-76.586,-13.769) v1@-76.802,-13.986 ; -76.892,-13.769 ccw(c-76.586,-13.769) v1@-76.802,-13.986 ; -76.892,-13.769 ccw(c-76.586,-13.769) v1@-76.802,-13.986
  other v1: -82.75,-1.8
CH3-6: D22.1 R22.2 U3.11 | length 39.6
  Top Layer w0.254: U3.11@-80.322,-14.75 -78.148,-14.75 -77.654,-15.244 -75.622,-15.244 v1(-75.267,-14.888)
  Bottom Layer w0.254: D22.1@-80.041,-1.8 -80.041,-5.644 -75.267,-10.418 v1(-75.267,-14.888) ; D22.1@-80.726,-2.276 cw(c-82.38,-3.93) -80.041,-3.93 ; D22.1@-80.726,-2.276 cw(c-82.38,-3.93) -80.041,-3.93 ; D22.1@-80.726,-2.276 cw(c-82.38,-3.93) -80.041,-3.93 ; D22.1@-80.546,-2.096 cw(c-81.767,-3.317) -80.041,-3.317 ; D22.1@-80.546,-2.096 cw(c-81.767,-3.317) -80.041,-3.317 ; D22.1@-80.546,-2.096 cw(c-81.767,-3.317) -80.041,-3.317 ; D22.1@-80.367,-1.917 cw(c-81.153,-2.703) -80.041,-2.703 ; D22.1@-80.367,-1.917 cw(c-81.153,-2.703) -80.041,-2.703 ; D22.1@-80.367,-1.917 cw(c-81.153,-2.703) -80.041,-2.703 ; D22.1@-80.34,-1.89 cw(c-81.062,-2.612) -80.041,-2.612 ; D22.1@-80.34,-1.89 cw(c-81.062,-2.612) -80.041,-2.612 ; D22.1@-80.34,-1.89 cw(c-81.062,-2.612) -80.041,-2.612 ; D22.1@-80.16,-1.71 cw(c-80.448,-1.998) D22.1@-80.041,-1.998 ; D22.1@-80.16,-1.71 cw(c-80.448,-1.998) D22.1@-80.041,-1.998 ; D22.1@-80.16,-1.71 cw(c-80.448,-1.998) D22.1@-80.041,-1.998 ; -80.041,-2.92 cw(c-79.13,-2.92) D22.1@-79.774,-2.276 ; -80.041,-2.92 cw(c-79.13,-2.92) D22.1@-79.774,-2.276 ; -80.041,-2.92 cw(c-79.13,-2.92) D22.1@-79.774,-2.276 ; v1@-75.356,-14.799 ccw(c-75.573,-14.582) -75.267,-14.582 ; v1@-75.356,-14.799 ccw(c-75.573,-14.582) -75.267,-14.582 ; v1@-75.356,-14.799 ccw(c-75.573,-14.582) -75.267,-14.582 ; -75.267,-14.582 ccw(c-74.96,-14.582) v1@-75.177,-14.799 ; -75.267,-14.582 ccw(c-74.96,-14.582) v1@-75.177,-14.799 ; -75.267,-14.582 ccw(c-74.96,-14.582) v1@-75.177,-14.799
  other v1: -80.25,-1.8
CH3-7: D23.1 R23.2 U3.10 | length 39.4
  Top Layer w0.254: U3.10@-80.322,-15.4 -78.565,-15.4 -77.984,-15.981 v1(-73.819,-15.981) ; -74.125,-15.981 cw(c-74.125,-16.287) v1@-73.909,-16.07 ; -74.125,-15.981 ccw(c-74.125,-15.674) v1@-73.909,-15.891 ; -74.125,-15.981 cw(c-74.125,-16.287) v1@-73.909,-16.07 ; -74.125,-15.981 ccw(c-74.125,-15.674) v1@-73.909,-15.891 ; -74.125,-15.981 ccw(c-74.125,-15.674) v1@-73.909,-15.891 ; -74.125,-15.981 cw(c-74.125,-16.287) v1@-73.909,-16.07
  Bottom Layer w0.254: D23.1@-77.541,-1.8 -77.752,-2.011 -77.752,-5.977 -73.819,-9.91 v1(-73.819,-15.981) ; D23.1@-78.226,-2.276 cw(c-79.371,-3.421) -77.752,-3.421 ; D23.1@-78.226,-2.276 cw(c-79.371,-3.421) -77.752,-3.421 ; D23.1@-78.226,-2.276 cw(c-79.371,-3.421) -77.752,-3.421 ; D23.1@-78.046,-2.096 cw(c-78.758,-2.808) -77.752,-2.808 ; D23.1@-78.046,-2.096 cw(c-78.758,-2.808) -77.752,-2.808 ; D23.1@-78.046,-2.096 cw(c-78.758,-2.808) -77.752,-2.808 ; D23.1@-77.84,-1.89 cw(c-78.053,-2.103) D23.1@-77.752,-2.103 ; D23.1@-77.84,-1.89 cw(c-78.053,-2.103) D23.1@-77.752,-2.103 ; D23.1@-77.84,-1.89 cw(c-78.053,-2.103) D23.1@-77.752,-2.103 ; -77.752,-3.429 cw(c-76.121,-3.429) D23.1@-77.274,-2.276 ; -77.752,-3.429 cw(c-76.121,-3.429) D23.1@-77.274,-2.276 ; -77.752,-3.429 cw(c-76.121,-3.429) D23.1@-77.274,-2.276 ; -77.752,-2.815 cw(c-76.735,-2.815) D23.1@-77.454,-2.096 ; -77.752,-2.815 cw(c-76.735,-2.815) D23.1@-77.454,-2.096 ; -77.752,-2.815 cw(c-76.735,-2.815) D23.1@-77.454,-2.096 ; D23.1@-77.752,-2.11 cw(c-77.44,-2.11) D23.1@-77.66,-1.89 ; D23.1@-77.752,-2.11 cw(c-77.44,-2.11) D23.1@-77.66,-1.89 ; D23.1@-77.752,-2.11 cw(c-77.44,-2.11) D23.1@-77.66,-1.89 ; v1@-73.909,-15.891 ccw(c-74.125,-15.674) -73.819,-15.674 ; v1@-73.909,-15.891 ccw(c-74.125,-15.674) -73.819,-15.674 ; v1@-73.909,-15.891 ccw(c-74.125,-15.674) -73.819,-15.674 ; -73.819,-15.674 ccw(c-73.512,-15.674) v1@-73.729,-15.891 ; -73.819,-15.674 ccw(c-73.512,-15.674) v1@-73.729,-15.891 ; -73.819,-15.674 ccw(c-73.512,-15.674) v1@-73.729,-15.891
  other v1: -77.75,-1.8
CH3-8: D24.1 R24.2 U3.9 | length 39.2
  Top Layer w0.254: U3.9@-80.322,-16.05 -78.88,-16.05 -78.061,-16.87 -72.523,-16.87 v1(-72.498,-16.844) ; -72.866,-16.87 ccw(c-72.866,-16.476) v1@-72.588,-16.754 ; -72.866,-16.87 ccw(c-72.866,-16.476) v1@-72.588,-16.754 ; -72.866,-16.87 ccw(c-72.866,-16.476) v1@-72.588,-16.754
  Bottom Layer w0.254: D24.1@-75.041,-1.8 -75.237,-1.996 -75.237,-5.926 -72.854,-8.31 -72.854,-16.489 v1(-72.498,-16.844) ; D24.1@-75.726,-2.276 cw(c-76.906,-3.456) -75.237,-3.456 ; D24.1@-75.726,-2.276 cw(c-76.906,-3.456) -75.237,-3.456 ; D24.1@-75.726,-2.276 cw(c-76.906,-3.456) -75.237,-3.456 ; D24.1@-75.546,-2.096 cw(c-76.293,-2.843) -75.237,-2.843 ; D24.1@-75.546,-2.096 cw(c-76.293,-2.843) -75.237,-2.843 ; D24.1@-75.546,-2.096 cw(c-76.293,-2.843) -75.237,-2.843 ; D24.1@-75.34,-1.89 cw(c-75.588,-2.138) D24.1@-75.237,-2.138 ; D24.1@-75.34,-1.89 cw(c-75.588,-2.138) D24.1@-75.237,-2.138 ; D24.1@-75.34,-1.89 cw(c-75.588,-2.138) D24.1@-75.237,-2.138 ; -75.237,-3.393 cw(c-73.657,-3.393) D24.1@-74.774,-2.276 ; -75.237,-3.393 cw(c-73.657,-3.393) D24.1@-74.774,-2.276 ; -75.237,-3.393 cw(c-73.657,-3.393) D24.1@-74.774,-2.276 ; -75.237,-2.78 cw(c-74.27,-2.78) D24.1@-74.954,-2.096 ; -75.237,-2.78 cw(c-74.27,-2.78) D24.1@-74.954,-2.096 ; -75.237,-2.78 cw(c-74.27,-2.78) D24.1@-74.954,-2.096 ; D24.1@-75.237,-2.075 cw(c-74.975,-2.075) D24.1@-75.16,-1.89 ; D24.1@-75.237,-2.075 cw(c-74.975,-2.075) D24.1@-75.16,-1.89 ; D24.1@-75.237,-2.075 cw(c-74.975,-2.075) D24.1@-75.16,-1.89
  other v1: -75.25,-1.8
CH4: P1.8 U4.8 | length 59.7
  Top Layer w0.254: v1(-65.756,-19.351) -63.176,-16.772 -63.176,-16.101 U4.8@-63.227,-16.05 ; v1@-65.756,-19.224 ccw(c-65.756,-18.918) -65.539,-19.135 ; v1@-65.756,-19.224 ccw(c-65.756,-18.918) -65.539,-19.135 ; v1@-65.756,-19.224 ccw(c-65.756,-18.918) -65.539,-19.135 ; v1@-65.629,-19.351 cw(c-65.322,-19.351) -65.539,-19.135 ; v1@-65.629,-19.351 cw(c-65.322,-19.351) -65.539,-19.135 ; v1@-65.629,-19.351 cw(c-65.322,-19.351) -65.539,-19.135 ; U4.8@-63.243,-16.066 cw(c-63.405,-16.228) -63.176,-16.228 ccw(c-63.405,-16.228) U4.8@-63.243,-16.066
  Bottom Layer w0.254: P1.8@-101.062,-27.708 -101.062,-24.247 -101.073,-24.236 -96.036,-19.199 -87.879,-19.199 -87.874,-19.204 -87.393,-19.204 -87.388,-19.199 -65.908,-19.199 v1(-65.756,-19.351) ; P1.8@-101.502,-27.267 ccw(c-102.566,-26.204) -101.062,-26.204 ; P1.8@-101.502,-27.267 ccw(c-102.566,-26.204) -101.062,-26.204 ; P1.8@-101.502,-27.267 ccw(c-102.566,-26.204) -101.062,-26.204 ; P1.8@-101.323,-27.447 ccw(c-101.953,-26.817) -101.062,-26.817 ; P1.8@-101.323,-27.447 ccw(c-101.953,-26.817) -101.062,-26.817 ; P1.8@-101.323,-27.447 ccw(c-101.953,-26.817) -101.062,-26.817 ; -101.062,-26.817 ccw(c-100.171,-26.817) P1.8@-100.801,-27.447 ; -101.062,-26.817 ccw(c-100.171,-26.817) P1.8@-100.801,-27.447 ; -101.062,-26.817 ccw(c-100.171,-26.817) P1.8@-100.801,-27.447 ; -101.062,-26.204 ccw(c-99.558,-26.204) P1.8@-100.621,-27.267 ; -101.062,-26.204 ccw(c-99.558,-26.204) P1.8@-100.621,-27.267 ; -101.062,-26.204 ccw(c-99.558,-26.204) P1.8@-100.621,-27.267 ; -66.43,-19.199 cw(c-66.43,-20.026) -65.846,-19.441 ccw(c-66.43,-20.026) -66.43,-19.199
CH4-1: D25.1 R25.2 U4.4 | length 32.6
  Top Layer w0.254: v1(-68.571,-10.111) -65.231,-13.45 U4.4@-63.227,-13.45 ; v1@-68.571,-10.238 cw(c-68.571,-10.544) -68.354,-10.328 ; v1@-68.571,-10.238 cw(c-68.571,-10.544) -68.354,-10.328 ; v1@-68.571,-10.238 cw(c-68.571,-10.544) -68.354,-10.328 ; v1@-68.444,-10.111 ccw(c-68.137,-10.111) -68.354,-10.328 ; v1@-68.444,-10.111 ccw(c-68.137,-10.111) -68.354,-10.328 ; v1@-68.444,-10.111 ccw(c-68.137,-10.111) -68.354,-10.328
  Bottom Layer w0.254: v1(-68.75,-1.8) -68.75,-9.931 v1(-68.571,-10.111) ; D25.1@-69.226,-2.276 cw(c-70.375,-3.425) -68.75,-3.425 ; D25.1@-69.226,-2.276 cw(c-70.375,-3.425) -68.75,-3.425 ; D25.1@-69.226,-2.276 cw(c-70.375,-3.425) -68.75,-3.425 ; D25.1@-69.046,-2.096 cw(c-69.762,-2.812) -68.75,-2.812 ; D25.1@-69.046,-2.096 cw(c-69.762,-2.812) -68.75,-2.812 ; D25.1@-69.046,-2.096 cw(c-69.762,-2.812) -68.75,-2.812 ; D25.1@-68.84,-1.89 cw(c-69.057,-2.107) D25.1@-68.75,-2.107 ; D25.1@-68.84,-1.89 cw(c-69.057,-2.107) D25.1@-68.75,-2.107 ; D25.1@-68.84,-1.89 cw(c-69.057,-2.107) D25.1@-68.75,-2.107 ; -68.75,-9.371 ccw(c-67.831,-9.371) v1@-68.481,-10.021 ; -68.75,-9.371 ccw(c-67.831,-9.371) v1@-68.481,-10.021 ; -68.75,-9.371 ccw(c-67.831,-9.371) v1@-68.481,-10.021 ; -68.75,-3.425 cw(c-67.125,-3.425) D25.1@-68.274,-2.276 ; -68.75,-3.425 cw(c-67.125,-3.425) D25.1@-68.274,-2.276 ; -68.75,-3.425 cw(c-67.125,-3.425) D25.1@-68.274,-2.276 ; -68.75,-2.812 cw(c-67.738,-2.812) D25.1@-68.454,-2.096 ; -68.75,-2.812 cw(c-67.738,-2.812) D25.1@-68.454,-2.096 ; -68.75,-2.812 cw(c-67.738,-2.812) D25.1@-68.454,-2.096 ; D25.1@-68.75,-2.107 cw(c-68.443,-2.107) D25.1@-68.66,-1.89 ; D25.1@-68.75,-2.107 cw(c-68.443,-2.107) D25.1@-68.66,-1.89 ; D25.1@-68.75,-2.107 cw(c-68.443,-2.107) D25.1@-68.66,-1.89
CH4-2: D26.1 R26.2 U4.5 | length 35.1
  Top Layer w0.254: v1(-69.374,-12.171) -67.875,-12.171 -65.946,-14.1 U4.5@-63.227,-14.1 ; v1@-69.284,-12.26 cw(c-69.067,-12.477) -69.067,-12.171 ; v1@-69.284,-12.26 cw(c-69.067,-12.477) -69.067,-12.171 ; v1@-69.284,-12.26 cw(c-69.067,-12.477) -69.067,-12.171 ; v1@-69.284,-12.081 ccw(c-69.067,-11.864) -69.067,-12.171 ; v1@-69.284,-12.081 ccw(c-69.067,-11.864) -69.067,-12.171 ; v1@-69.284,-12.081 ccw(c-69.067,-11.864) -69.067,-12.171
  Bottom Layer w0.254: v1(-69.374,-12.171) -66.289,-9.086 -66.289,-2.057 D26.1@-66.546,-1.8 ; v1@-69.374,-12.044 ccw(c-69.374,-11.737) -69.157,-11.954 ; v1@-69.374,-12.044 ccw(c-69.374,-11.737) -69.157,-11.954 ; v1@-69.374,-12.044 ccw(c-69.374,-11.737) -69.157,-11.954 ; v1@-69.247,-12.171 cw(c-68.94,-12.171) -69.157,-11.954 ; v1@-69.247,-12.171 cw(c-68.94,-12.171) -69.157,-11.954 ; v1@-69.247,-12.171 cw(c-68.94,-12.171) -69.157,-11.954 ; D26.1@-66.726,-2.276 cw(c-67.78,-3.33) -66.289,-3.33 ; D26.1@-66.726,-2.276 cw(c-67.78,-3.33) -66.289,-3.33 ; D26.1@-66.726,-2.276 cw(c-67.78,-3.33) -66.289,-3.33 ; D26.1@-66.546,-2.096 cw(c-67.167,-2.717) -66.289,-2.717 ; D26.1@-66.546,-2.096 cw(c-67.167,-2.717) -66.289,-2.717 ; D26.1@-66.546,-2.096 cw(c-67.167,-2.717) -66.289,-2.717 ; -66.289,-3.519 cw(c-64.531,-3.519) D26.1@-65.774,-2.276 ; -66.289,-3.519 cw(c-64.531,-3.519) D26.1@-65.774,-2.276 ; -66.289,-3.519 cw(c-64.531,-3.519) D26.1@-65.774,-2.276 ; -66.289,-2.906 cw(c-65.144,-2.906) D26.1@-65.954,-2.096 ; -66.289,-2.906 cw(c-65.144,-2.906) D26.1@-65.954,-2.096 ; -66.289,-2.906 cw(c-65.144,-2.906) D26.1@-65.954,-2.096 ; D26.1@-66.289,-2.201 cw(c-65.849,-2.201) D26.1@-66.16,-1.89 ; D26.1@-66.289,-2.201 cw(c-65.849,-2.201) D26.1@-66.16,-1.89 ; D26.1@-66.289,-2.201 cw(c-65.849,-2.201) D26.1@-66.16,-1.89
  other v1: -66.25,-1.8
CH4-3: D27.1 R27.2 U4.6 | length 36.5
  Top Layer w0.254: v1(-68.917,-14.38) -68.917,-14.431 -68.598,-14.75 U4.6@-63.227,-14.75 ; v1@-68.79,-14.38 ccw(c-68.36,-14.38) -68.664,-14.684 ; v1@-68.79,-14.38 ccw(c-68.36,-14.38) -68.664,-14.684 ; v1@-68.79,-14.38 ccw(c-68.36,-14.38) -68.664,-14.684
  Bottom Layer w0.254: v1(-68.917,-14.38) -63.775,-9.238 -63.775,-2.071 D27.1@-64.046,-1.8 ; v1@-68.917,-14.253 ccw(c-68.917,-13.947) -68.7,-14.164 ; v1@-68.917,-14.253 ccw(c-68.917,-13.947) -68.7,-14.164 ; v1@-68.917,-14.253 ccw(c-68.917,-13.947) -68.7,-14.164 ; v1@-68.79,-14.38 cw(c-68.483,-14.38) -68.7,-14.164 ; v1@-68.79,-14.38 cw(c-68.483,-14.38) -68.7,-14.164 ; v1@-68.79,-14.38 cw(c-68.483,-14.38) -68.7,-14.164 ; D27.1@-64.226,-2.276 cw(c-65.315,-3.365) -63.775,-3.365 ; D27.1@-64.226,-2.276 cw(c-65.315,-3.365) -63.775,-3.365 ; D27.1@-64.226,-2.276 cw(c-65.315,-3.365) -63.775,-3.365 ; D27.1@-64.046,-2.096 cw(c-64.702,-2.752) -63.775,-2.752 ; D27.1@-64.046,-2.096 cw(c-64.702,-2.752) -63.775,-2.752 ; D27.1@-64.046,-2.096 cw(c-64.702,-2.752) -63.775,-2.752 ; -63.775,-3.484 cw(c-62.066,-3.484) D27.1@-63.274,-2.276 ; -63.775,-3.484 cw(c-62.066,-3.484) D27.1@-63.274,-2.276 ; -63.775,-3.484 cw(c-62.066,-3.484) D27.1@-63.274,-2.276 ; -63.775,-2.871 cw(c-62.679,-2.871) D27.1@-63.454,-2.096 ; -63.775,-2.871 cw(c-62.679,-2.871) D27.1@-63.454,-2.096 ; -63.775,-2.871 cw(c-62.679,-2.871) D27.1@-63.454,-2.096 ; D27.1@-63.775,-2.166 cw(c-63.384,-2.166) D27.1@-63.66,-1.89 ; D27.1@-63.775,-2.166 cw(c-63.384,-2.166) D27.1@-63.66,-1.89 ; D27.1@-63.775,-2.166 cw(c-63.384,-2.166) D27.1@-63.66,-1.89
  other v1: -63.75,-1.8
CH4-4: D28.1 R28.2 U4.7 | length 38
  Top Layer w0.254: v1(-67.113,-16.237) -66.276,-15.4 U4.7@-63.227,-15.4 ; v1@-67.113,-16.11 ccw(c-67.113,-15.803) -66.896,-16.02 ; v1@-67.113,-16.11 ccw(c-67.113,-15.803) -66.896,-16.02 ; v1@-67.113,-16.11 ccw(c-67.113,-15.803) -66.896,-16.02 ; v1@-66.986,-16.237 cw(c-66.68,-16.237) -66.896,-16.02 ; v1@-66.986,-16.237 cw(c-66.68,-16.237) -66.896,-16.02 ; v1@-66.986,-16.237 cw(c-66.68,-16.237) -66.896,-16.02
  Bottom Layer w0.254: v1(-67.113,-16.237) -61.26,-10.384 -61.26,-2.086 D28.1@-61.546,-1.8 ; v1@-67.113,-16.11 ccw(c-67.113,-15.803) -66.896,-16.02 ; v1@-67.113,-16.11 ccw(c-67.113,-15.803) -66.896,-16.02 ; v1@-67.113,-16.11 ccw(c-67.113,-15.803) -66.896,-16.02 ; v1@-66.986,-16.237 cw(c-66.68,-16.237) -66.896,-16.02 ; v1@-66.986,-16.237 cw(c-66.68,-16.237) -66.896,-16.02 ; v1@-66.986,-16.237 cw(c-66.68,-16.237) -66.896,-16.02 ; D28.1@-61.726,-2.276 cw(c-62.851,-3.401) -61.26,-3.401 ; D28.1@-61.726,-2.276 cw(c-62.851,-3.401) -61.26,-3.401 ; D28.1@-61.726,-2.276 cw(c-62.851,-3.401) -61.26,-3.401 ; D28.1@-61.546,-2.096 cw(c-62.237,-2.787) -61.26,-2.787 ; D28.1@-61.546,-2.096 cw(c-62.237,-2.787) -61.26,-2.787 ; D28.1@-61.546,-2.096 cw(c-62.237,-2.787) -61.26,-2.787 ; D28.1@-61.34,-1.89 cw(c-61.532,-2.082) D28.1@-61.26,-2.082 ; D28.1@-61.34,-1.89 cw(c-61.532,-2.082) D28.1@-61.26,-2.082 ; D28.1@-61.34,-1.89 cw(c-61.532,-2.082) D28.1@-61.26,-2.082 ; -61.26,-3.449 cw(c-59.601,-3.449) D28.1@-60.774,-2.276 ; -61.26,-3.449 cw(c-59.601,-3.449) D28.1@-60.774,-2.276 ; -61.26,-3.449 cw(c-59.601,-3.449) D28.1@-60.774,-2.276 ; -61.26,-2.836 cw(c-60.214,-2.836) D28.1@-60.954,-2.096 ; -61.26,-2.836 cw(c-60.214,-2.836) D28.1@-60.954,-2.096 ; -61.26,-2.836 cw(c-60.214,-2.836) D28.1@-60.954,-2.096 ; D28.1@-61.26,-2.131 cw(c-60.919,-2.131) D28.1@-61.16,-1.89 ; D28.1@-61.26,-2.131 cw(c-60.919,-2.131) D28.1@-61.16,-1.89 ; D28.1@-61.26,-2.131 cw(c-60.919,-2.131) D28.1@-61.16,-1.89
  other v1: -61.25,-1.8
CH4-5: D29.1 R29.2 U4.12 | length 33.8
  Top Layer w0.254: U4.12@-56.776,-14.1 -53.371,-14.1 v1(-53.346,-14.076) ; -53.712,-14.1 ccw(c-53.712,-13.71) v1@-53.436,-13.986 ; -53.712,-14.1 ccw(c-53.712,-13.71) v1@-53.436,-13.986 ; -53.712,-14.1 ccw(c-53.712,-13.71) v1@-53.436,-13.986
  Bottom Layer w0.254: D29.1@-58.995,-1.8 -58.745,-2.05 -58.745,-5.73 -53.346,-11.129 v1(-53.346,-14.076) ; D29.1@-59.226,-2.276 cw(c-60.386,-3.436) -58.745,-3.436 ; D29.1@-59.226,-2.276 cw(c-60.386,-3.436) -58.745,-3.436 ; D29.1@-59.226,-2.276 cw(c-60.386,-3.436) -58.745,-3.436 ; D29.1@-59.046,-2.096 cw(c-59.773,-2.823) -58.745,-2.823 ; D29.1@-59.046,-2.096 cw(c-59.773,-2.823) -58.745,-2.823 ; D29.1@-59.046,-2.096 cw(c-59.773,-2.823) -58.745,-2.823 ; D29.1@-58.84,-1.89 cw(c-59.068,-2.118) D29.1@-58.745,-2.118 ; D29.1@-58.84,-1.89 cw(c-59.068,-2.118) D29.1@-58.745,-2.118 ; D29.1@-58.84,-1.89 cw(c-59.068,-2.118) D29.1@-58.745,-2.118 ; -58.745,-3.414 cw(c-57.136,-3.414) D29.1@-58.274,-2.276 ; -58.745,-3.414 cw(c-57.136,-3.414) D29.1@-58.274,-2.276 ; -58.745,-3.414 cw(c-57.136,-3.414) D29.1@-58.274,-2.276 ; -58.745,-2.8 cw(c-57.75,-2.8) D29.1@-58.454,-2.096 ; -58.745,-2.8 cw(c-57.75,-2.8) D29.1@-58.454,-2.096 ; -58.745,-2.8 cw(c-57.75,-2.8) D29.1@-58.454,-2.096 ; D29.1@-58.745,-2.095 cw(c-58.455,-2.095) D29.1@-58.66,-1.89 ; D29.1@-58.745,-2.095 cw(c-58.455,-2.095) D29.1@-58.66,-1.89 ; D29.1@-58.745,-2.095 cw(c-58.455,-2.095) D29.1@-58.66,-1.89 ; -53.346,-13.769 cw(c-53.653,-13.769) -53.436,-13.986 ccw(c-53.653,-13.769) -53.346,-13.769 ; -53.346,-13.769 ccw(c-53.04,-13.769) -53.257,-13.986 cw(c-53.04,-13.769) -53.346,-13.769
  other v1: -58.75,-1.8
CH4-6: D30.1 R30.2 U4.11 | length 35.3
  Top Layer w0.254: U4.11@-56.776,-14.75 -54.602,-14.75 -54.108,-15.244 -52.076,-15.244 v1(-51.721,-14.888)
  Bottom Layer w0.254: D30.1@-56.495,-1.8 -56.282,-2.013 -56.282,-5.857 -51.721,-10.418 v1(-51.721,-14.888) ; D30.1@-56.726,-2.276 cw(c-57.798,-3.348) -56.282,-3.348 ; D30.1@-56.726,-2.276 cw(c-57.798,-3.348) -56.282,-3.348 ; D30.1@-56.726,-2.276 cw(c-57.798,-3.348) -56.282,-3.348 ; D30.1@-56.546,-2.096 cw(c-57.185,-2.735) -56.282,-2.735 ; D30.1@-56.546,-2.096 cw(c-57.185,-2.735) -56.282,-2.735 ; D30.1@-56.546,-2.096 cw(c-57.185,-2.735) -56.282,-2.735 ; -56.282,-3.501 cw(c-54.549,-3.501) D30.1@-55.774,-2.276 ; -56.282,-3.501 cw(c-54.549,-3.501) D30.1@-55.774,-2.276 ; -56.282,-3.501 cw(c-54.549,-3.501) D30.1@-55.774,-2.276 ; -56.282,-2.888 cw(c-55.162,-2.888) D30.1@-55.954,-2.096 ; -56.282,-2.888 cw(c-55.162,-2.888) D30.1@-55.954,-2.096 ; -56.282,-2.888 cw(c-55.162,-2.888) D30.1@-55.954,-2.096 ; D30.1@-56.282,-2.183 cw(c-55.867,-2.183) D30.1@-56.16,-1.89 ; D30.1@-56.282,-2.183 cw(c-55.867,-2.183) D30.1@-56.16,-1.89 ; D30.1@-56.282,-2.183 cw(c-55.867,-2.183) D30.1@-56.16,-1.89 ; v1@-51.811,-14.799 ccw(c-52.027,-14.582) -51.721,-14.582 ; v1@-51.811,-14.799 ccw(c-52.027,-14.582) -51.721,-14.582 ; v1@-51.811,-14.799 ccw(c-52.027,-14.582) -51.721,-14.582 ; -51.721,-14.582 ccw(c-51.414,-14.582) v1@-51.631,-14.799 ; -51.721,-14.582 ccw(c-51.414,-14.582) v1@-51.631,-14.799 ; -51.721,-14.582 ccw(c-51.414,-14.582) v1@-51.631,-14.799
  other v1: -56.25,-1.8
CH4-7: D31.1 R31.2 U4.10 | length 39.2
  Top Layer w0.254: U4.10@-56.776,-15.4 -55.019,-15.4 -54.439,-15.981 v1(-50.273,-15.981) ; -50.58,-15.981 cw(c-50.58,-16.287) v1@-50.363,-16.07 ; -50.58,-15.981 ccw(c-50.58,-15.674) v1@-50.363,-15.891 ; -50.58,-15.981 cw(c-50.58,-16.287) v1@-50.363,-16.07 ; -50.58,-15.981 ccw(c-50.58,-15.674) v1@-50.363,-15.891 ; -50.58,-15.981 ccw(c-50.58,-15.674) v1@-50.363,-15.891 ; -50.58,-15.981 cw(c-50.58,-16.287) v1@-50.363,-16.07
  Bottom Layer w0.254: D31.1@-53.995,-1.8 -53.742,-2.053 -53.742,-6.441 -50.273,-9.91 v1(-50.273,-15.981) ; D31.1@-54.226,-2.276 cw(c-55.395,-3.445) -53.742,-3.445 ; D31.1@-54.226,-2.276 cw(c-55.395,-3.445) -53.742,-3.445 ; D31.1@-54.226,-2.276 cw(c-55.395,-3.445) -53.742,-3.445 ; D31.1@-54.046,-2.096 cw(c-54.782,-2.832) -53.742,-2.832 ; D31.1@-54.046,-2.096 cw(c-54.782,-2.832) -53.742,-2.832 ; D31.1@-54.046,-2.096 cw(c-54.782,-2.832) -53.742,-2.832 ; D31.1@-53.84,-1.89 cw(c-54.077,-2.127) D31.1@-53.742,-2.127 ; D31.1@-53.84,-1.89 cw(c-54.077,-2.127) D31.1@-53.742,-2.127 ; D31.1@-53.84,-1.89 cw(c-54.077,-2.127) D31.1@-53.742,-2.127 ; -53.742,-3.404 cw(c-52.146,-3.404) D31.1@-53.274,-2.276 ; -53.742,-3.404 cw(c-52.146,-3.404) D31.1@-53.274,-2.276 ; -53.742,-3.404 cw(c-52.146,-3.404) D31.1@-53.274,-2.276 ; -53.742,-2.791 cw(c-52.759,-2.791) D31.1@-53.454,-2.096 ; -53.742,-2.791 cw(c-52.759,-2.791) D31.1@-53.454,-2.096 ; -53.742,-2.791 cw(c-52.759,-2.791) D31.1@-53.454,-2.096 ; D31.1@-53.742,-2.086 cw(c-53.464,-2.086) D31.1@-53.66,-1.89 ; D31.1@-53.742,-2.086 cw(c-53.464,-2.086) D31.1@-53.66,-1.89 ; D31.1@-53.742,-2.086 cw(c-53.464,-2.086) D31.1@-53.66,-1.89 ; v1@-50.363,-15.891 ccw(c-50.58,-15.674) -50.273,-15.674 ; v1@-50.363,-15.891 ccw(c-50.58,-15.674) -50.273,-15.674 ; v1@-50.363,-15.891 ccw(c-50.58,-15.674) -50.273,-15.674 ; -50.273,-15.674 ccw(c-49.966,-15.674) v1@-50.183,-15.891 ; -50.273,-15.674 ccw(c-49.966,-15.674) v1@-50.183,-15.891 ; -50.273,-15.674 ccw(c-49.966,-15.674) v1@-50.183,-15.891
  other v1: -53.75,-1.8
CH4-8: D32.1 R32.2 U4.9 | length 38.6
  Top Layer w0.254: U4.9@-56.776,-16.05 -55.334,-16.05 -54.515,-16.87 -48.978,-16.87 v1(-48.952,-16.844) ; -49.32,-16.87 ccw(c-49.32,-16.476) v1@-49.042,-16.754 ; -49.32,-16.87 ccw(c-49.32,-16.476) v1@-49.042,-16.754 ; -49.32,-16.87 ccw(c-49.32,-16.476) v1@-49.042,-16.754
  Bottom Layer w0.254: D32.1@-51.495,-1.8 -51.278,-2.017 -51.278,-6.34 -49.308,-8.31 -49.308,-16.489 v1(-48.952,-16.844) ; D32.1@-51.726,-2.276 cw(c-52.808,-3.358) -51.278,-3.358 ; D32.1@-51.726,-2.276 cw(c-52.808,-3.358) -51.278,-3.358 ; D32.1@-51.726,-2.276 cw(c-52.808,-3.358) -51.278,-3.358 ; D32.1@-51.546,-2.096 cw(c-52.194,-2.744) -51.278,-2.744 ; D32.1@-51.546,-2.096 cw(c-52.194,-2.744) -51.278,-2.744 ; D32.1@-51.546,-2.096 cw(c-52.194,-2.744) -51.278,-2.744 ; -51.278,-3.492 cw(c-49.558,-3.492) D32.1@-50.774,-2.276 ; -51.278,-3.492 cw(c-49.558,-3.492) D32.1@-50.774,-2.276 ; -51.278,-3.492 cw(c-49.558,-3.492) D32.1@-50.774,-2.276 ; -51.278,-2.879 cw(c-50.171,-2.879) D32.1@-50.954,-2.096 ; -51.278,-2.879 cw(c-50.171,-2.879) D32.1@-50.954,-2.096 ; -51.278,-2.879 cw(c-50.171,-2.879) D32.1@-50.954,-2.096 ; D32.1@-51.278,-2.174 cw(c-50.876,-2.174) D32.1@-51.16,-1.89 ; D32.1@-51.278,-2.174 cw(c-50.876,-2.174) D32.1@-51.16,-1.89 ; D32.1@-51.278,-2.174 cw(c-50.876,-2.174) D32.1@-51.16,-1.89
  other v1: -51.25,-1.8